# Altium PCB ML307R模组封装 .pcbdoc
Units mm, origin at the board's own origin, x right, y up, seen from the top; angles counter-clockwise.
Board outline 29.25 x 30.51 mm, 2 copper layers (Top Layer, Bottom Layer); 1 components, 0 nets, 109 pads, 0 vias.
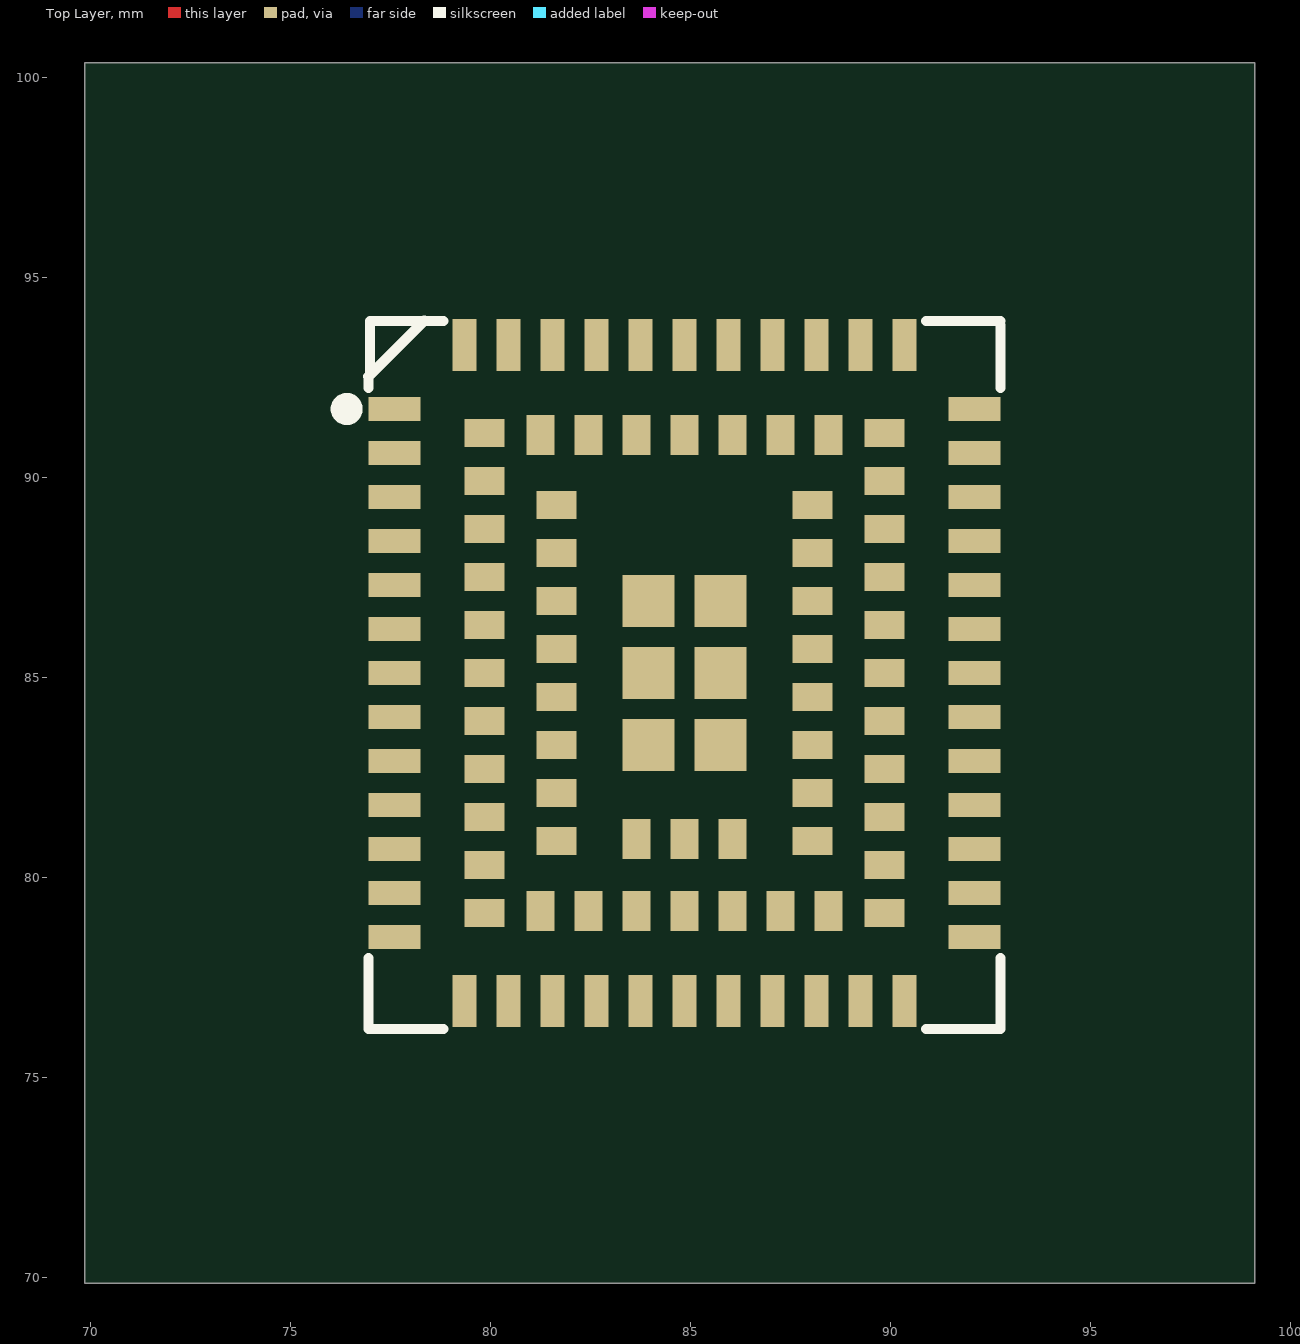
[diagram p0: Top Layer view]
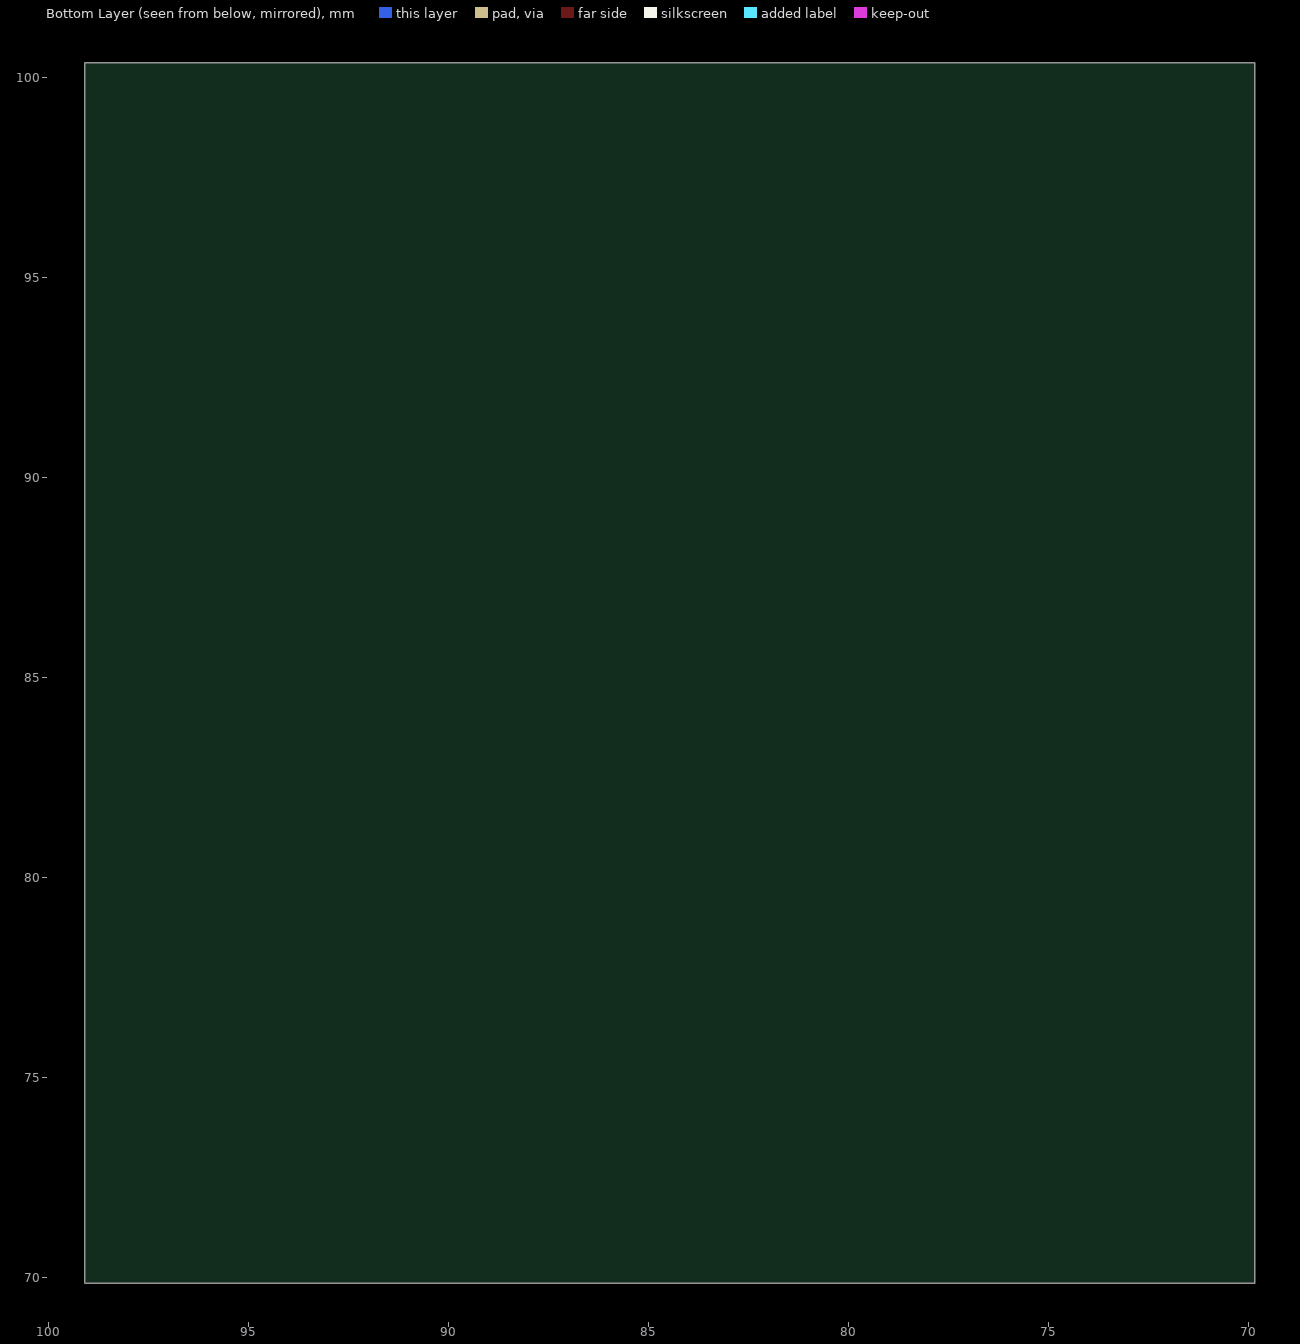
[diagram p1: Bottom Layer view, seen from below]

## Layer stack, top to bottom
Top Layer: signal copper (thickness not stored)
Dielectric: dielectric 0.32, FR-4, Dk 4.8
Bottom Layer: signal copper (thickness not stored)

## Board outline
99.1,69.85 69.85,69.85 69.85,100.36 99.1,100.36

## Components (designator, comment, footprint, x,y, rotation, side; value= is the part's Value field where it differs from the comment)
? "LGA-109_L17.7-W15.8-AIR780E" LGA-109_L17.7-W15.8-AIR780E 84.85,85.1 r0 top

## Footprints (in the part's own frame and the unit in brackets; to place one, negate y for a bottom-side part, rotate by r counter-clockwise, add the part's x,y. Pads: shape width x height; smd on the part's side, far side on the other; paste and mask are expansions set on the pad)
LGA-109_L17.7-W15.8-AIR780E [mm]
  rect 1.3x0.6 smd paste+0 mask+0.05: 1(-7.25,6.6) 2(-7.25,5.5) 3(-7.25,4.4) 4(-7.25,3.3) 5(-7.25,2.2) 6(-7.25,1.1) 7(-7.25,0) 8(-7.25,-1.1) 9(-7.25,-2.2) 10(-7.25,-3.3) 11(-7.25,-4.4) 12(-7.25,-5.5) 13(-7.25,-6.6) 23(7.25,-6.6) 24(7.25,-5.5) 25(7.25,-4.4) 26(7.25,-3.3) 27(7.25,-2.2) 28(7.25,-1.1) 29(7.25,0) 30(7.25,1.1) 31(7.25,2.2) 32(7.25,3.3) 33(7.25,4.4) 34(7.25,5.5) 35(7.25,6.6)
  rect 0.6x1.3 smd paste+0 mask+0.05: 14(-4.4,-8.2) 15(-3.3,-8.2) 16(-2.2,-8.2) 17(-1.1,-8.2) 18(0,-8.2) 19(1.1,-8.2) 20(2.2,-8.2) 21(3.3,-8.2) 22(4.4,-8.2) 36(4.4,8.2) 37(3.3,8.2) 38(2.2,8.2) 39(1.1,8.2) 40(0,8.2) 41(-1.1,8.2) 42(-2.2,8.2) 43(-3.3,8.2) 44(-4.4,8.2) 95(-5.5,-8.2) 96(5.5,-8.2) 97(5.5,8.2) 98(-5.5,8.2)
  rect 1x0.7 smd paste+0 mask+0.05: 45(-5,4.8) 46(-5,3.6) 47(-5,2.4) 48(-5,1.2) 49(-5,0) 50(-5,-1.2) 51(-5,-2.4) 52(-5,-3.6) 53(-5,-4.8) 59(5,-4.8) 60(5,-3.6) 61(5,-2.4) 62(5,-1.2) 63(5,0) 64(5,1.2) 65(5,2.4) 66(5,3.6) 67(5,4.8) 73(-3.2,4.2) 74(-3.2,3) 75(-3.2,1.8) 76(-3.2,0.6) 77(-3.2,-0.6) 78(-3.2,-1.8) 79(-3.2,-3) 80(-3.2,-4.2) 81(3.2,-4.2) 82(3.2,-3) 83(3.2,-1.8) 84(3.2,-0.6) 85(3.2,0.6) 86(3.2,1.8) 87(3.2,3) 88(3.2,4.2) 99(-5,6) 100(-5,-6) 103(5,-6) 104(5,6)
  rect 0.7x1 smd paste+0 mask+0.05: 54(-2.4,-5.95) 55(-1.2,-5.95) 56(0,-5.95) 57(1.2,-5.95) 58(2.4,-5.95) 68(2.4,5.95) 69(1.2,5.95) 70(0,5.95) 71(-1.2,5.95) 72(-2.4,5.95) 101(-3.6,-5.95) 102(3.6,-5.95) 105(3.6,5.95) 106(-3.6,5.95) 107(-1.2,-4.15) 108(0,-4.15) 109(1.2,-4.15)
  rect 1.3x1.3 smd paste+0 mask+0.05: 89(-0.9,1.8) 90(-0.9,0) 91(-0.9,-1.8) 92(0.9,-1.8) 93(0.9,0) 94(0.9,1.8)
  silkscreen extent -8.65,-8.9 7.9,8.81

## Nets (pads, with @x,y where several pads share a name; then routed paths per layer and width w, separated by ;. In a path a pad name is that pad's centre, name@x,y a point inside that pad or via, vN(x,y) a via of type N, cw(c..) or ccw(c..) an arc to the next point about the centre after c; other vN are vias at no path point)
pads on no net: ?.1 ?.2 ?.3 ?.4 ?.5 ?.6 ?.7 ?.8 ?.9 ?.10 ?.11 ?.12 ?.13 ?.14 ?.15 ?.16 ?.17 ?.18 ?.19 ?.20 ?.21 ?.22 ?.23 ?.24 ?.25 ?.26 ?.27 ?.28 ?.29 ?.30 ?.31 ?.32 ?.33 ?.34 ?.35 ?.36 ?.37 ?.38 ?.39 ?.40 ?.41 ?.42 ?.43 ?.44 ?.45 ?.46 ?.47 ?.48 ?.49 ?.50 ?.51 ?.52 ?.53 ?.54 ?.55 ?.56 ?.57 ?.58 ?.59 ?.60 ?.61 ?.62 ?.63 ?.64 ?.65 ?.66 ?.67 ?.68 ?.69 ?.70 ?.71 ?.72 ?.73 ?.74 ?.75 ?.76 ?.77 ?.78 ?.79 ?.80 ?.81 ?.82 ?.83 ?.84 ?.85 ?.86 ?.87 ?.88 ?.89 ?.90 ?.91 ?.92 ?.93 ?.94 ?.95 ?.96 ?.97 ?.98 ?.99 ?.100 ?.101 ?.102 ?.103 ?.104 ?.105 ?.106 ?.107 ?.108 ?.109